# Altium PCB PCB1.PcbDoc
Units mm, origin at the board's own origin, x right, y up, seen from the top; angles counter-clockwise.
Board outline 25 x 17 mm, 2 copper layers (Top Layer, Bottom Layer); 9 components, 6 nets, 20 pads, 3 vias.
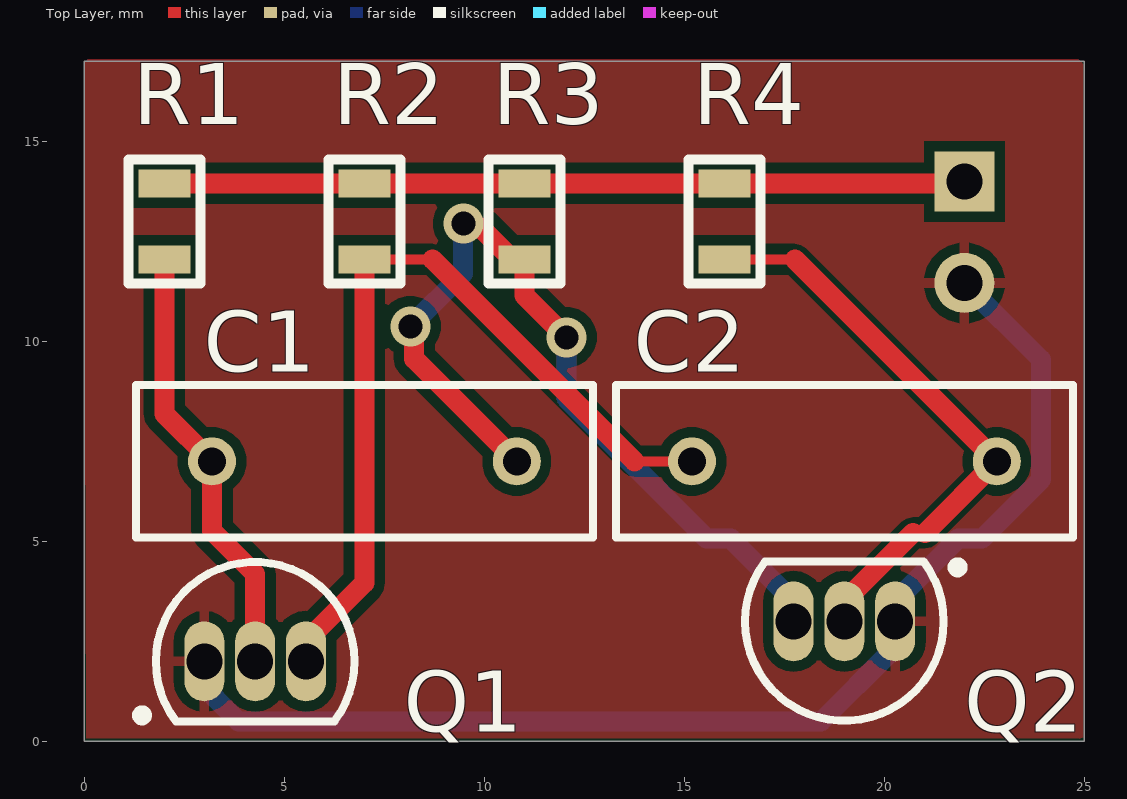
[diagram p0: Top Layer view]
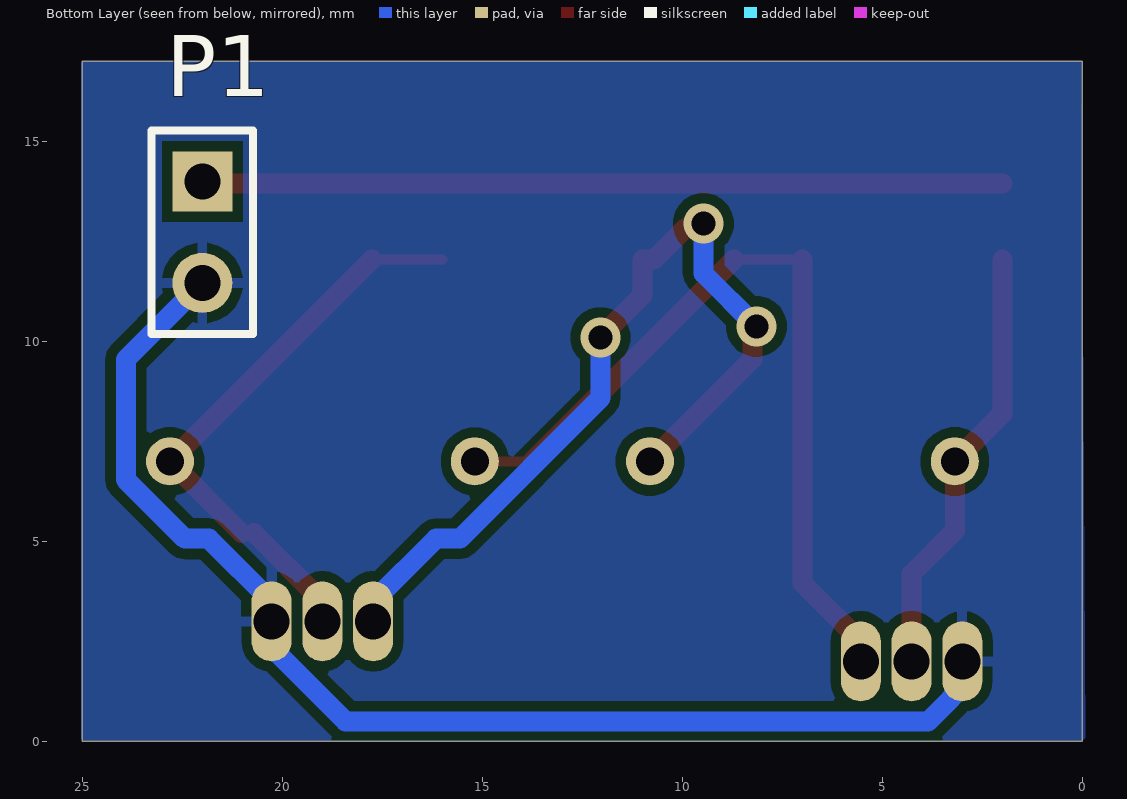
[diagram p1: Bottom Layer view, seen from below]

## Layer stack, top to bottom
Top Solder: solder mask 0.0102, Solder Resist, Dk 3.5
Top Layer: signal copper 0.0356
Dielectric 1: dielectric 0.32, FR-4, Dk 4.8
Bottom Layer: signal copper 0.0356
Bottom Solder: solder mask 0.0102, Solder Resist, Dk 3.5

## Board outline
0,0 0,17 25,17 25,0

## Design rules (kind name [scope] priority, off if disabled: settings)
Clearance [All] p1: gap=0.254 ignorepadtopadclearanceinfootprint=FALSE except(0.3: Arc-Arc Arc-Track Track-Track)
PolygonConnect [All] p1: connectstyle=Relief reliefconductorwidth=0.254 reliefentries=4 polygonreliefangle="90 Angle" airgapwidth=0.254
RoutingVias [All] p1: holewidth=0.6 width=1 viastyle="Through Hole" minholewidth=0.4 minwidth=0.7 maxholewidth=0.711 maxwidth=1.27
SolderMaskExpansion [All] p1: expansion=0.102 istentingtop=FALSE
SupplyNets "Schematic Supply Nets" [InNet('GND')] p1: voltage=0.000
Width [All] p1: maxlimit=1 minlimit=0.1 preferedwidth=0.254
30 further rules are at their usual default settings.

## Components (designator, comment, footprint, x,y, rotation, side; value= is the part's Value field where it differs from the comment)
C1 "Cap" RAD-0.3 7,7 r0 top value=100pF
C2 "Cap" RAD-0.3 19,7 r0 top value=100pF
P1 "Header 2" HDR1X2 22,14 r270 bottom
Q1 "2N3904" TO-92A 4.27,2 r270 top
Q2 "2N3904" TO-92A 19,3 r90 top
R1 "Res" "Res 0805" 2,13 r90 top
R2 "Res" "Res 0805" 7,13 r90 top
R3 "Res" "Res 0805" 11,13 r90 top
R4 "Res" "Res 0805" 16,13 r90 top

## Footprints (in the part's own frame and the unit in brackets; to place one, negate y for a bottom-side part, rotate by r counter-clockwise, add the part's x,y. Pads: shape width x height; smd on the part's side, far side on the other; paste and mask are expansions set on the pad)
HDR1X2 [mm] "Connector; Header; 2 Position"
  rect 1.5x1.5 hole 0.9: 1(0,0)
  round 1.5 hole 0.9: 2(2.54,0)
  silkscreen extent -1.27,-1.27 3.81,1.27
RAD-0.3 [mm] "Radial Cap, Thru-Hole; 2 Leads; 0.3 in Pin Spacing"
  round 1.2 hole 0.7: 1(-3.81,0) 2(3.81,0)
  silkscreen extent -5.71,-1.91 5.71,1.91
"Res 0805" [mm]
  rect 0.7x1.3 smd: 1(-0.95,0) 2(0.95,0)
  silkscreen extent -1.55,-0.9 1.55,0.9
TO-92A [mm] "TO, Flat Index; 3 In-Line, Axial Leads; Body Dia. 4.5mm; Leads 0.51 x 0.48 mm (max)"
  oval 2x1 hole 0.9: 1(0,-1.27) 2(0,0) 3(0,1.27)
  silkscreen extent -2.48,-2.95 1.5,2.48, body extent -2.48,-2.5 1.5,2.5, height 6.86

## Part data
C1 C2: "Capacitor", LatestRevisionDate=17-Jul-2002, LatestRevisionNote="Re-released for DXP Platform.", PackageDescription="Radial Cap, Thru-Hole; 2 Leads; 0.3 in Pin Spacing", PackageReference=RAD-0.3, Published=8-Jun-2000, Publisher="Altium Limited"
P1: "Header, 2-Pin", LatestRevisionDate=17-Jul-2002, LatestRevisionNote="Re-released for DXP Platform.", Publisher="Altium Limited"
Q1 Q2: "NPN General Purpose Amplifier", ComponentLink1Description="Manufacturer Link", ComponentLink1URL=http://www.fairchildsemi.com/, ComponentLink2Description=Datasheet, ComponentLink2URL=http://www.fairchildsemi.com/ds/2N%2F2N3904.pdf, DatasheetVersion=1997, LatestRevisionDate=15-Jan-2003, LatestRevisionNote="PCB Footprint 'BCY-W3/D4.7' replaced", PackageDescription="TO, Flat Index; 3 In-Line, Axial Leads; Body Dia. 4.5mm; Leads 0.51 x 0.48 mm (max)", PackageReference=TO-92A, PackageVersion=Sep-1998, Published=8-Jun-2000, Publisher="Altium Limited"

## Via types
v1: diameter 1, hole 0.6, Top Layer to Bottom Layer, 3 vias

## Nets (pads, with @x,y where several pads share a name; then routed paths per layer and width w, separated by ;. In a path a pad name is that pad's centre, name@x,y a point inside that pad or via, vN(x,y) a via of type N, cw(c..) or ccw(c..) an arc to the next point about the centre after c; other vN are vias at no path point)
+12V: P1.1 R1.2 R2.2 R3.2 R4.2 | length 20
  Top Layer w0.5: R1.2 R2.2 R3.2 R4.2 21.95,13.95 P1.1
GND: P1.2 Q1.1 Q2.1 | length 30.8
  Bottom Layer w0.5: Q1.1 3,1.365 3.266,1.099 3.266,1.084 3.854,0.496 18.416,0.496 20.174,2.254 20.174,2.904 Q2.1 20.27,3.5 21.839,5.069 22.44,5.069 23.914,6.543 23.914,9.546 P1.2
NetC1_1: C1.1 Q1.2 R1.1 | length 11
  Top Layer w0.5: R1.1 2,8.19 C1.1 3.19,5.263 4.27,4.183 Q1.2
NetC1_2: C1.2 Q2.3 R3.1 | length 21.7
  Top Layer w0.5: v1(8.15,10.375) 8.246,10.279 8.246,9.564 C1.2 ; v1(9.475,12.946) 9.571,12.85 9.9,12.85 10.7,12.05 R3.1 11,11.15 v1(12.05,10.1)
  Bottom Layer w0.5: v1(8.15,10.375) 9.471,11.696 9.471,12.942 v1(9.475,12.946) ; v1(12.05,10.1) 12.05,8.579 15.56,5.069 16.161,5.069 17.73,3.5 Q2.3
NetC2_1: C2.1 Q1.3 R2.1 | length 20.9
  Top Layer w0.254: R2.1 8.704,12.05 ; 13.754,7 C2.1
  Top Layer w0.5: Q1.3 5.54,2.5 7,3.96 R2.1 ; 8.704,12.05 13.754,7
NetC2_2: C2.2 Q2.2 R4.1 | length 14.7
  Top Layer w0.254: R4.1 17.76,12.05 ; Q2.2 Q2.2@19,3.5 ; 20.711,5.211 21.021,5.211
  Top Layer w0.5: 17.76,12.05 C2.2 21.021,5.211 ; Q2.2@19,3.5 20.711,5.211

## Polygon pours and split planes (outlines as drawn)
GND on Top Layer "GND_L01_P000" (solid, pour order 0): 0,17 0.05,17.05 24.975,17.05 24.925,17 24.975,16.95 24.975,-0.025 24.875,0.075 0.05,0.075
GND on Bottom Layer "GND_L02_P002" (solid, pour order 2): 0.025,17 24.975,17 25.025,16.95 25.025,0.075 24.95,0 -0.075,0

## Silkscreen, mask and mechanical layers (free items; w line width, h text height)
Mechanical 1:
  the board outline again, w0.254